# EAGLE board WirelessReceiver (EAGLE 9.6.2)
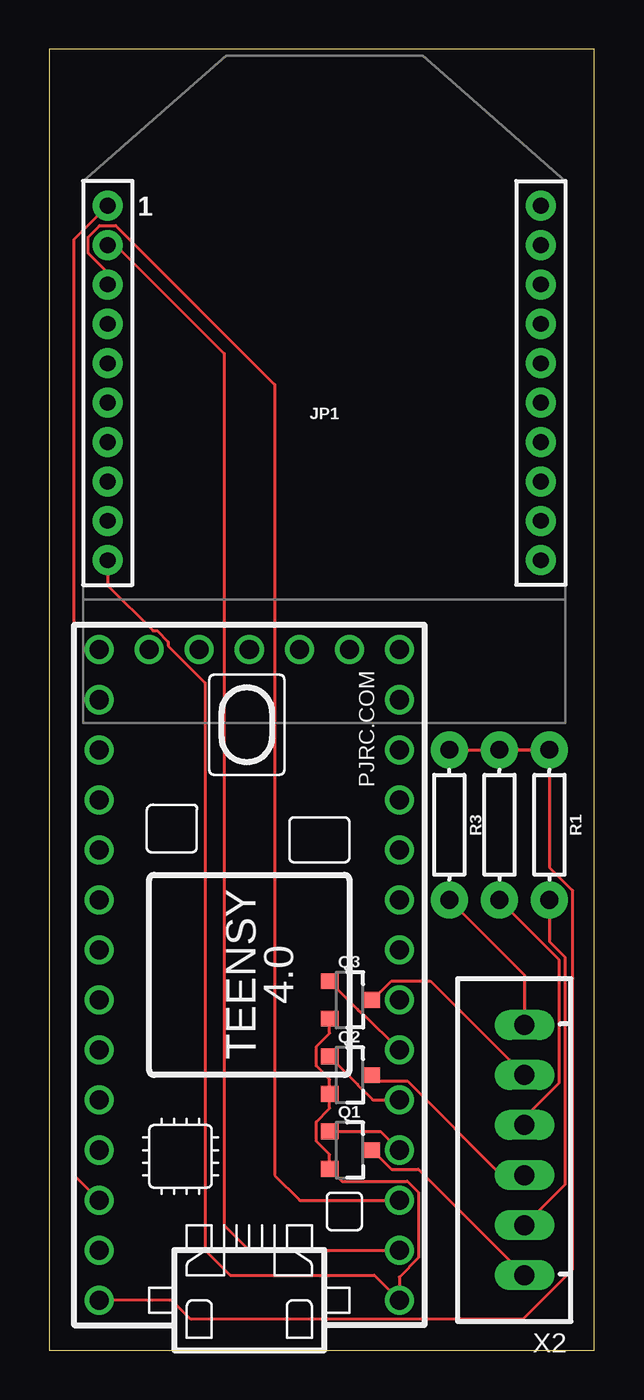
[diagram p0: board, top side]

Size 27.69 x 66.04 mm. Coordinates in mm from the lower left corner, seen from the top.
Outline: 0,0 27.69,0 27.69,66.04 0,66.04 0,0
Copper layers (1*16): Top 0.035mm / dielectric 1.5mm / Bottom 0.035mm
Design rules "default": minimum track width 6mil, minimum drill 0.35mm, track to track 6mil, track to pad 6mil, pad to pad 6mil, via to via 6mil, smd to smd 6mil, copper to edge 40mil, drill to drill 6mil, minimum pad ring 10mil, minimum via ring 8mil, stop-mask expansion 4mil, vias tented up to drill 0mil, thermal gap 10mil

## Footprints (pad centres in the part's own frame; a part is rotated, then mirrored left to right if it is on the bottom)
XBEE = drill 0.8 pad 1.524: 1 -11,20; 2 -11,18; 3 -11,16; 4 -11,14; 5 -11,12; 6 -11,10; 7 -11,8; 8 -11,6; 9 -11,4; 10 -11,2; 11 11,2; 12 11,4; 13 11,6; 14 11,8; 15 11,10; 16 11,12; 17 11,14; 18 11,16; 19 11,18; 20 11,20
SOT23-3 = smd 0.8 x 0.9: 1 -0.95,-1; 2 0.95,-1; 3 0,1.1
AXIAL-0.3 = drill 0.9 pad 1.88: P$1 -3.81,0; P$2 3.81,0
TEENSY_4.0-BASIC = drill 0.965: 0/RX -13.97,-7.62; 1/TX -11.43,-7.62; 2 -8.89,-7.62; 3/CANTX -6.35,-7.62; 3V3_LN 16.51,-2.54; 3V3_LO -11.43,7.62; 4/CANRX -3.81,-7.62; 5 -1.27,-7.62; 6 1.27,-7.62; 7 3.81,-7.62; 8 6.35,-7.62; 9/CS 8.89,-7.62; 10/CS 11.43,-7.62; 11/MOSI 13.97,-7.62; 12/MISO 16.51,-7.62; 13/SCK 16.51,7.62; 14/A0 13.97,7.62; 15/A1 11.43,7.62; 16/A2 8.89,7.62; 17/A3 6.35,7.62; 18/A4/SDA 3.81,7.62; 19/A5/SCL 1.27,7.62; 20/A6 -1.27,7.62; 21/A7 -3.81,7.62; 22/A8 -6.35,7.62; 23/A9 -8.89,7.62; GND -16.51,-7.62; GND2 -13.97,7.62; GND3 16.51,0; ON/OFF 16.51,5.08; PROG 16.51,2.54; VBAT\ 16.51,-5.08; VIN -16.51,7.62
JST-XH-06-PACKAGE-LONG-PAD = drill 1.016 long: 1 -6.35,0; 2 -3.81,0; 3 -1.27,0; 4 1.27,0; 5 3.81,0; 6 6.35,0

## Placement (x,y rotation side)
FRAME1  FRAME-LETTERNO_PACKAGE  [DUMMY]  -26.67,73.66 0 top  (outside the outline)
JP1  [XBEE]  13.97,38.1 0 top
Q1  600mA/40V  [SOT23-3]  15.24,10.16 270 top
Q2  600mA/40V  [SOT23-3]  15.24,13.97 270 top
Q3  600mA/40V  [SOT23-3]  15.24,17.78 270 top
R1  100  [AXIAL-0.3]  25.4,26.67 270 top
R2  100  [AXIAL-0.3]  22.86,26.67 270 top
R3  100  [AXIAL-0.3]  20.32,26.67 270 top
U$1  TEENSY_4.0-BASIC  [TEENSY_4.0-BASIC]  10.16,19.05 90 top
X2  JST-XH-06-PIN-LONG-PAD  [JST-XH-06-PACKAGE-LONG-PAD]  24.13,10.16 90 top

## Library data of the parts
FRAME1 = SparkFun-Aesthetics; DESIGNER: Nobody; VERSION: v01
JP1 = SparkFun-RF
Q1-Q3 = SparkFun-DiscreteSemi; PROD_ID: TRANS-08049
R1-R3 = SparkFun-Resistors; PROD_ID: RES-12181
U$1 = Teensy-4.0
X2 = Rembrandt Electronics - JST XH Connectors v1-0

## Nets
3V3: JP1.1 U$1.3V3_LO
5V: R1.P$1 R2.P$1 R3.P$1 U$1.VIN
GND: JP1.10 Q1.2 Q2.2 Q3.2 U$1.GND
N$1: JP1.2 U$1.0/RX
N$2: JP1.3 U$1.1/TX
N$3: R1.P$2 X2.2
N$4: R2.P$2 X2.4
N$5: R3.P$2 X2.6
N$6: Q1.3 X2.1
N$7: Q2.3 X2.3
N$8: Q3.3 X2.5
N$9: Q1.1 U$1.2
N$10: Q2.1 U$1.3/CANTX
N$11: Q3.1 U$1.4/CANRX

## Tracks (layer width: path | path; a pad name or v marks a point on that pad's centre or on a via)
3V3
  Top 0.152: JP1.1 1.27,56.4 1.27,8.89 U$1.3V3_LO
5V
  Top 0.152: R1.P$1 R2.P$1 R3.P$1 R1.P$1 | U$1.VIN 6.22,2.54 7.19,1.57 24.06,1.57 26.57,4.08 26.57,23.34 25.4,24.51 R1.P$1
GND
  Top 0.152: JP1.10 2.97,38.83 5.28,36.52 5.48,36.52 6.04,35.96 6.04,35.76 7.92,33.88 7.92,5.08 9.2,3.81 16.51,3.81 U$1.GND 17.78,3.71 18.75,4.68 18.75,8.02 18.18,8.59 14.87,8.59 Q1.2 14.24,9.94 13.56,10.62 13.56,11.61 14.24,12.28 Q2.2 14.24,13.75 13.56,14.43 13.56,15.41 14.24,16.09 Q3.2
N$1
  Top 0.152: JP1.2 3.38,56.1 8.89,50.59 8.89,6.35 10.16,5.08 U$1.0/RX
N$2
  Top 0.152: U$1.1/TX 12.7,7.62 12.7,7.64 11.45,8.89 11.45,49.02 3.38,57.09 2.56,57.09 1.98,56.51 1.98,55.69 2.97,54.7 JP1.3
N$3
  Top 0.152: R1.P$2 25.4,20.75 26.19,19.96 26.19,8.41 X2.2
N$4
  Top 0.152: X2.4 24.13,11.81 25.88,13.56 25.88,19.84 R2.P$2
N$5
  Top 0.152: R3.P$2 24.13,19.05 X2.6
N$6
  Top 0.152: X2.1 18.75,9.2 17.38,9.2 16.41,10.16 Q1.3
N$7
  Top 0.152: Q2.3 16.64,13.66 18.18,13.66 22.95,8.89 X2.3
N$8
  Top 0.152: Q3.3 16.41,17.78 17.38,18.75 19.36,18.75 X2.5
N$9
  Top 0.152: Q1.1 16.83,11.11 U$1.2
N$10
  Top 0.152: Q2.1 15.66,13.5 15.66,13.47 16.44,12.7 U$1.3/CANTX
N$11
  Top 0.152: U$1.4/CANRX 15.87,17.15 15.79,17.15 15.66,17.29 15.66,17.31 Q3.1